# EAGLE board BT840F_Board (EAGLE 9.5.2)
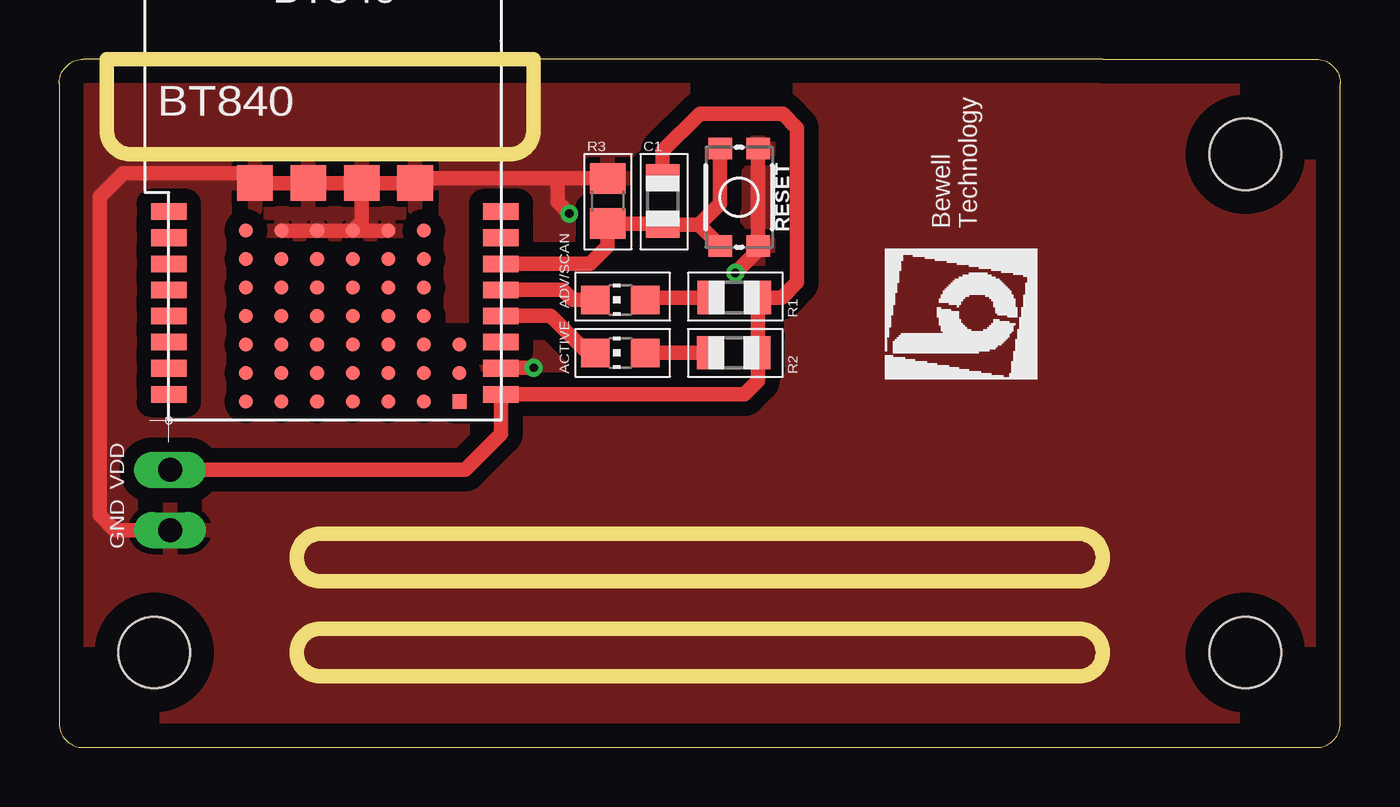
[diagram p0: board, top side]
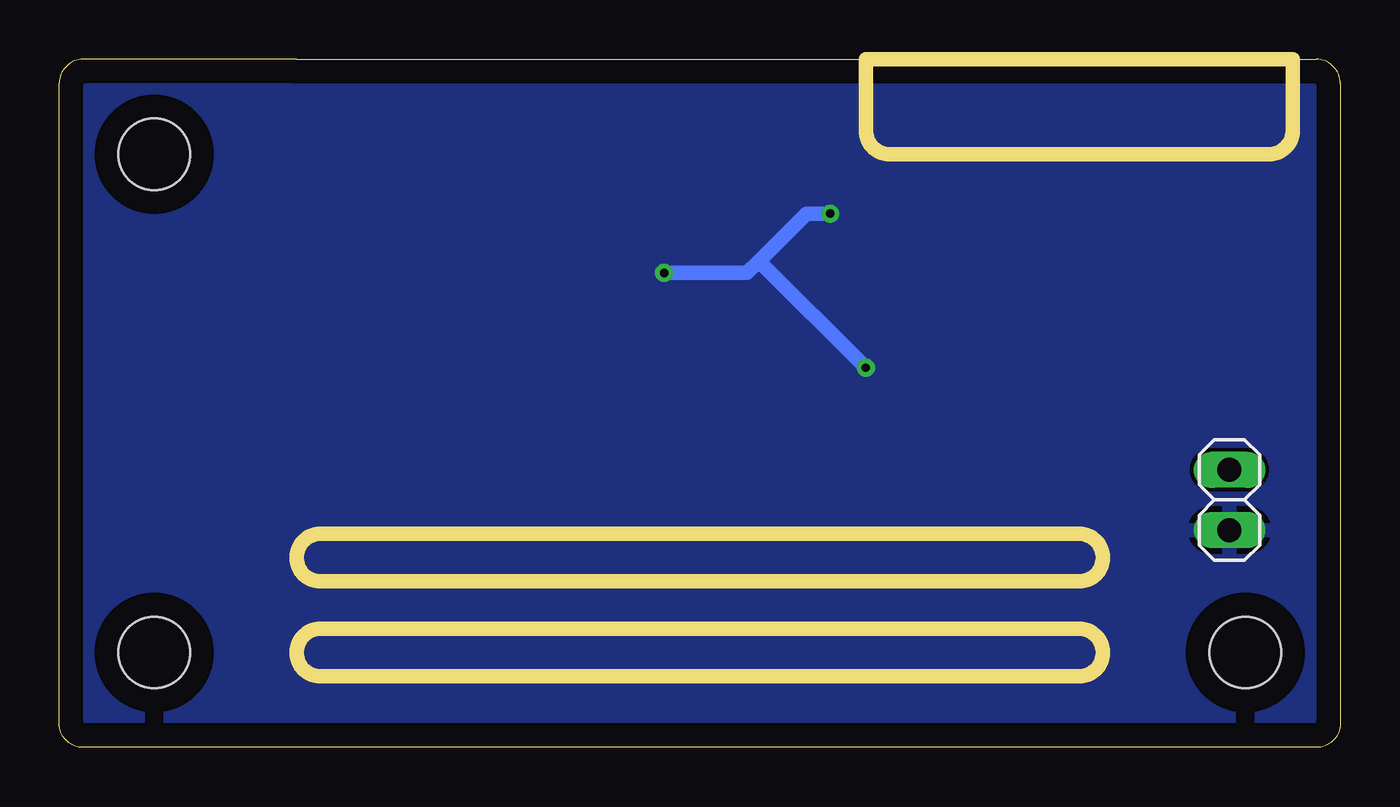
[diagram p1: board, bottom side, seen from below]

Size 54 x 29 mm. Coordinates in mm from the lower left corner, seen from the top.
Outline: 1,0 44,0 53,0 arc90 54,1 54,28 arc90 53,29 44,29 1,29 arc90 0,28 0,1 arc90 1,0
Copper layers (1*16): Top 0.035mm / dielectric 1.5mm / Bottom 0.035mm
Design rules "default": minimum track width 6mil, minimum drill 0.35mm, track to track 6mil, track to pad 6mil, pad to pad 6mil, via to via 6mil, smd to smd 6mil, copper to edge 40mil, drill to drill 6mil, minimum pad ring 10mil, minimum via ring 8mil, stop-mask expansion 4mil, vias tented up to drill 0mil, thermal gap 10mil
Holes 3 mm at 50,25 4,4 50,4
Milling: 18 lines

## Footprints (pad centres in the part's own frame; a part is rotated, then mirrored left to right if it is on the bottom)
C0805 = smd 1.3 x 1.5: 1 -0.95,0; 2 0.95,0
1X02 = drill 1.016 long: 1 -1.27,0; 2 1.27,0
CHIP-LED0805 = smd 1.2 x 1.2: A 0,-1.05; C 0,1.05
R0805 = smd 1.1 x 1.4: 1 -1,0; 2 1,0
TACTILE_SWITCH_SMD_4.6X2.8MM = smd 0.9 x 1: 1 -2.05,-0.8; 2 2.05,-0.8; 3 2.05,0.8; 4 -2.05,0.8
BT840 = smd 1.5 x 0.7: P$1 0,8.8; P$2 0,7.7; P$3 0,6.6; P$4 0,5.5; P$5 0,4.4; P$6 0,3.3; P$7 0,2.2; P$8 0,1.1; P$9 14,1.1; P$10 14,2.2; P$11 14,3.3; P$12 14,4.4; P$13 14,5.5; P$14 14,6.6; P$15 14,7.7; P$16 14,8.8 | smd 0.6 x 0.6: P$A0 4.75,8; P$A1 4.75,6.8; P$A2 4.75,5.6; P$A3 4.75,4.4; P$A4 4.75,3.2; P$A5 4.75,2; P$A6 4.75,0.8; P$B0 6.25,8; P$B1 6.25,6.8; P$B2 6.25,5.6; P$B3 6.25,4.4; P$B4 6.25,3.2; P$B5 6.25,2; P$B6 6.25,0.8; P$C0 7.75,8; P$C1 7.75,6.8; P$C2 7.75,5.6; P$C3 7.75,4.4; P$C4 7.75,3.2; P$C5 7.75,2; P$C6 7.75,0.8; P$D0 9.25,8; P$D1 9.25,6.8; P$D2 9.25,5.6; P$D3 9.25,4.4; P$D4 9.25,3.2; P$D5 9.25,2; P$D6 9.25,0.8; P$E0 10.75,8; P$E1 10.75,6.8; P$E2 10.75,5.6; P$E3 10.75,4.4; P$E4 10.75,3.2; P$E5 10.75,2; P$E6 10.75,0.8; P$F4 12.25,3.2; P$F5 12.25,2; P$F6 12.25,0.8; P$Z0 3.25,8; P$Z1 3.25,6.8; P$Z2 3.25,5.6; P$Z3 3.25,4.4; P$Z4 3.25,3.2; P$Z5 3.25,2; P$Z6 3.25,0.8 | smd 1.5 x 1.5: P$F0 3.63,10; P$F1 5.88,10; P$F2 8.13,10; P$F3 10.38,10

## Placement (x,y rotation side)
C1  [C0805]  23.12,23.03 90 top
JP1  [1X02]  4.67,10.43 90 bottom
LED  [CHIP-LED0805]  23.65,18.86 90 top
LED_2  [CHIP-LED0805]  23.65,16.63 90 top
R_LED1  4.7k  [R0805]  28.46,18.96 0 top
R_LED2  4.7k  [R0805]  28.44,16.63 0 top
R_RESET  4.7k  [R0805]  25.44,23.03 90 top
RESET  [TACTILE_SWITCH_SMD_4.6X2.8MM]  28.66,23.19 270 top
U1  BT840  [BT840]  4.62,13.78 0 top

## Library data of the parts
C1 = rcl; SPICEPREFIX: C
JP1 = pinhead
LED LED_2 = led
R_LED1 R_LED2 R_RESET = adafruit
RESET = SparkFun-Switches; PROD_ID: SWCH-13065
U1 = BT840F

## Nets
GND: C1.2 JP1.1 RESET.3 RESET.4 U1.P$10 U1.P$A0 U1.P$B0 U1.P$C0 U1.P$D0 U1.P$F0 U1.P$F1 U1.P$F2 U1.P$F3
LED1: LED.C U1.P$13
LED2: LED_2.C U1.P$12
N$2: LED_2.A R_LED2.1
N$3: LED.A R_LED1.1
RESET: C1.1 R_RESET.1 RESET.1 RESET.2 U1.P$14
VDD: JP1.2 R_LED1.2 R_LED2.2 R_RESET.2 U1.P$9

## Tracks (layer width: path | path; a pad name or v marks a point on that pad's centre or on a via)
GND  (via drill 0.35)
  Top 0.61: U1.P$F2 U1.P$F1 U1.P$F0 7.83,24.2 2.7,24.2 1.7,23.2 1.7,9.8 2.34,9.16 JP1.1 | U1.P$F2 U1.P$F3 15.2,23.98 21,23.98 | U1.P$A0 U1.P$B0 U1.P$C0 | U1.P$D0 U1.P$C0 | U1.P$C0 12.75,22.16 U1.P$F2 | RESET.4 RESET.3 29.46,20.96 v28.5,20 | 21,23.98 C1.2 | U1.P$10 18.64,16 v20,16 | v21.5,22.5 21,23 21,23.98
  Bottom 0.61: v20,16 24.5,20.5 | 24.5,20.5 22.5,22.5 v21.5,22.5 | v28.5,20 25,20 24.5,20.5
  pour Top (isolate 0.61): -1,30 55,30 55,-1 -1,-1
  pour Bottom: -1.12,30 54.88,30 55.12,29.75 55.12,-1 55,-1.12 -1,-1.12 -1,29.88
LED1
  Top 0.61: U1.P$13 21.22,19.28 21.64,18.86 LED.C
LED2
  Top 0.61: LED_2.C 22.27,16.63 20.7,18.2 18.64,18.2 U1.P$12
N$2
  Top 0.61: R_LED2.1 LED_2.A
N$3
  Top 0.61: LED.A 24.8,18.96 R_LED1.1
RESET
  Top 0.61: 26.97,22.03 R_RESET.1 25.39,22.08 C1.1 23.12,21.12 22.38,20.38 U1.P$14 | 26.97,22.03 RESET.2 | RESET.1 27.86,22.92 26.97,22.03
VDD
  Top 0.61: 29.46,16.61 R_LED2.2 | 29.46,16.61 R_LED1.2 30.46,18.96 31.1,19.6 31.1,26.1 30.5,26.7 27,26.7 25.44,25.14 R_RESET.2 | JP1.2 17.1,11.7 18.62,13.22 U1.P$9 28.88,14.88 29.46,15.46 29.46,16.61

## Text on the board
tPlace: BT840 | R3 | C1 | Bewell / Technology | ADV/SCAN | R1 | ACTIVE | R2 | VDD | GND